# EAGLE board Placa 1 (EAGLE 7.2.0)
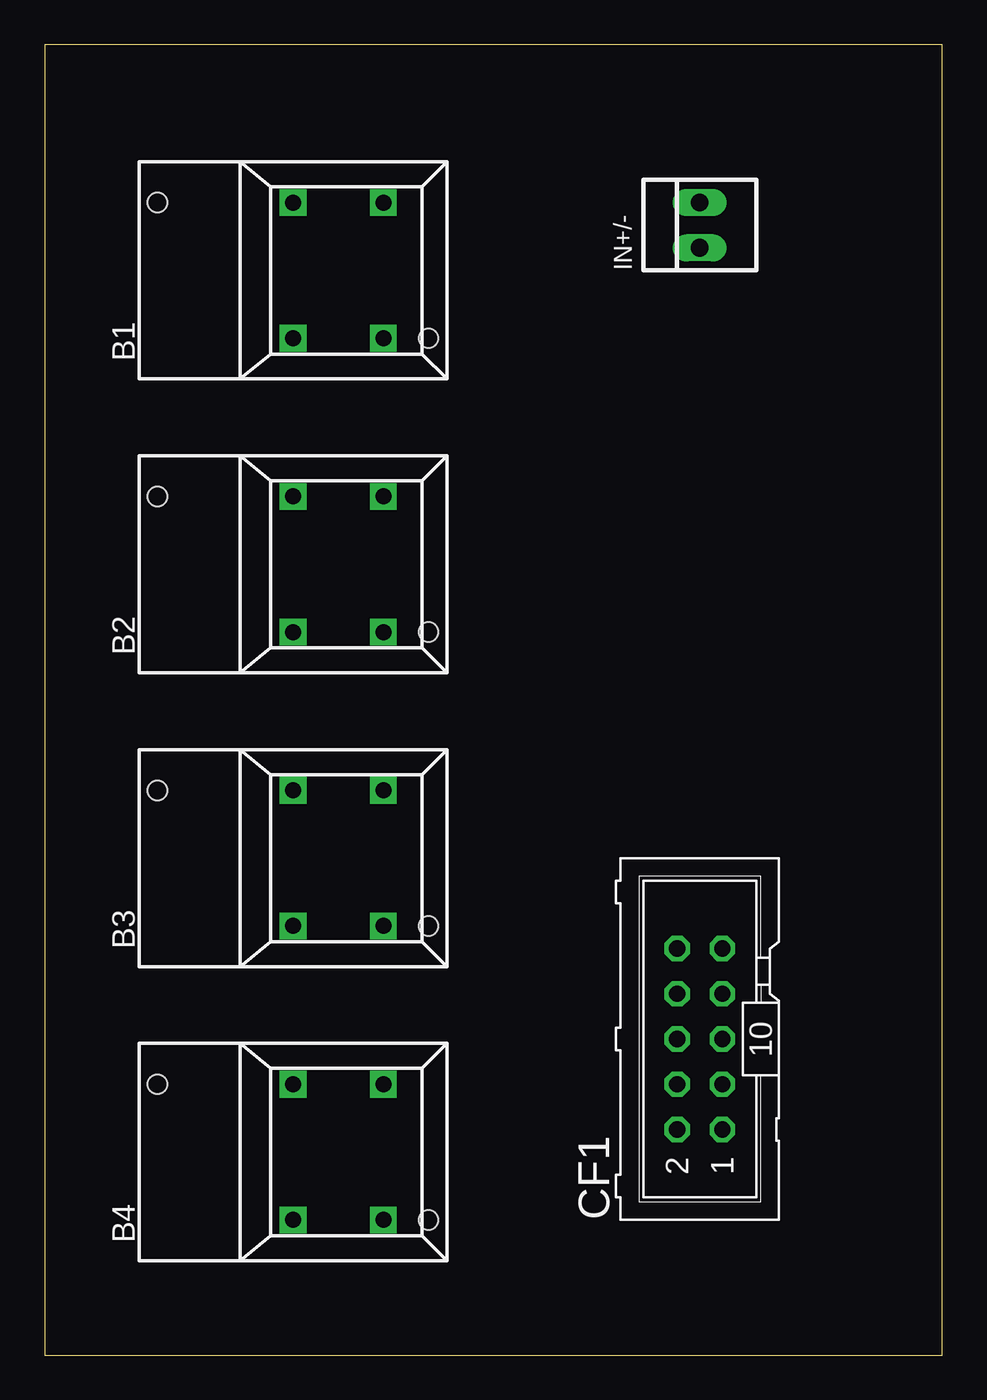
[diagram p0: board, top side]
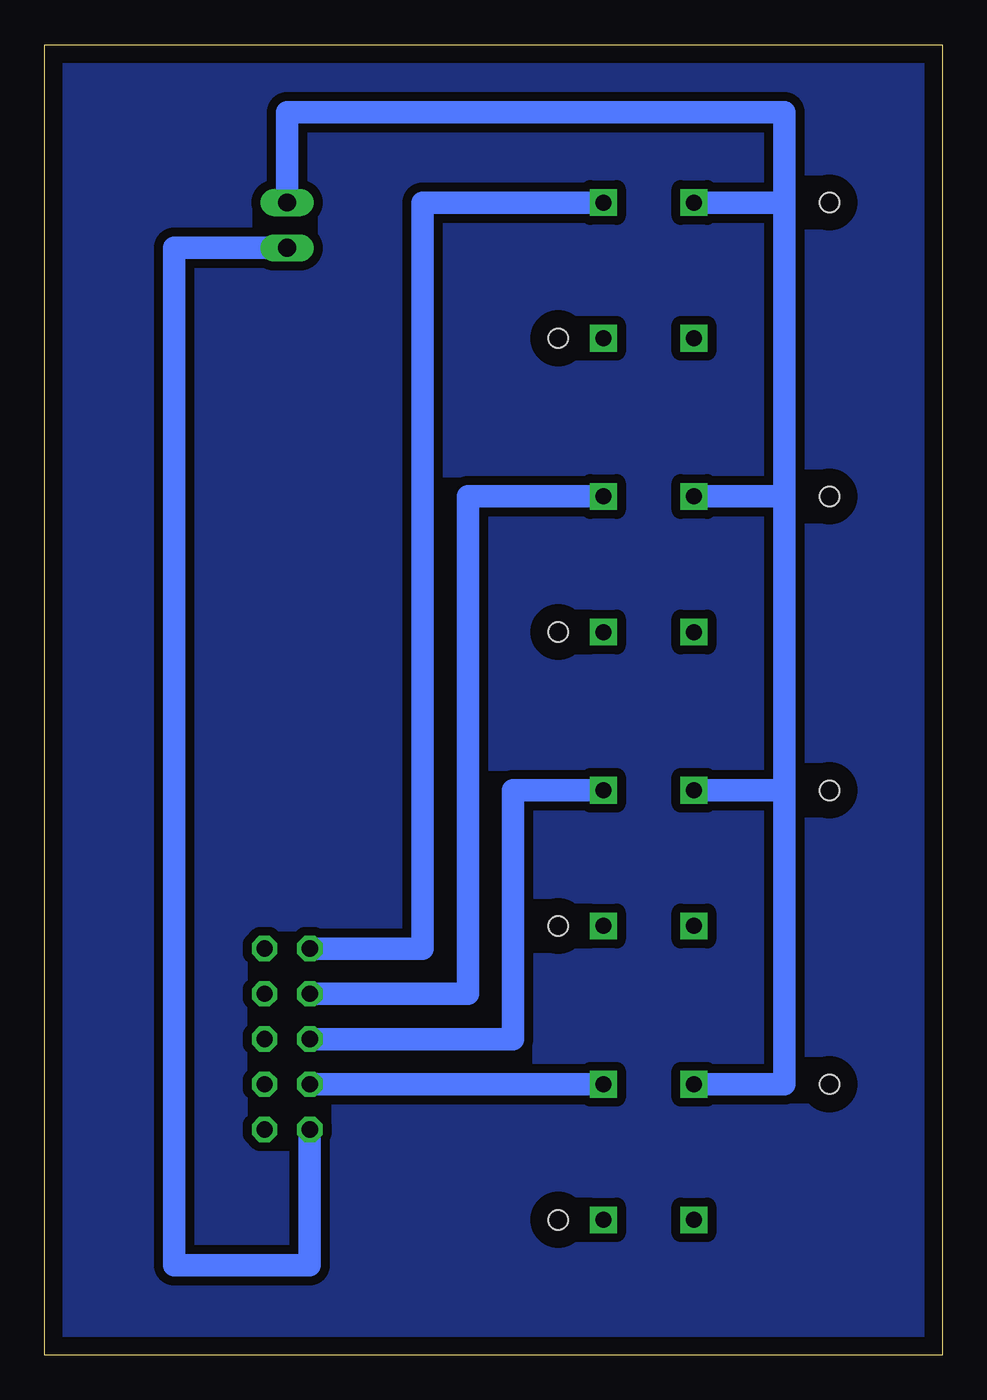
[diagram p1: board, bottom side, seen from below]

Size 50.47 x 73.65 mm. Coordinates in mm from the lower left corner, seen from the top.
Outline: 0,0 50.47,0 50.47,73.65 0,73.65 0,0
Copper layers (1*16): Top 0.035mm / dielectric 1.5mm / Bottom 0.035mm
Design rules "default *": minimum track width 10mil, minimum drill 24mil, track to track 20mil, track to pad 20mil, pad to pad 8mil, via to via 8mil, smd to smd 8mil, copper to edge 40mil, drill to drill 8mil, minimum pad ring 10mil, minimum via ring 8mil, stop-mask expansion 4mil, vias tented up to drill 0mil, thermal gap 10mil

## Footprints (pad centres in the part's own frame; a part is rotated, then mirrored left to right if it is on the bottom)
5501 = drill 0.9 pad 1.5 square: 1A 0,3.81; 1B 0,-3.81; NC 5.08,-3.81; NO 5.08,3.81 | hole 1.1: -7.62,3.81; 7.62,-3.81
ML10 = drill 0.914 octagon: 1 -5.08,-1.27; 2 -5.08,1.27; 3 -2.54,-1.27; 4 -2.54,1.27; 5 0,-1.27; 6 0,1.27; 7 2.54,-1.27; 8 2.54,1.27; 9 5.08,-1.27; 10 5.08,1.27
22-23-2021 = drill 1 long: 1 -1.27,0; 2 1.27,0

## Placement (x,y rotation side)
B1  5501  [5501]  13.97,60.96 0 top
B2  5501  [5501]  13.97,44.45 0 top
B3  5501  [5501]  13.97,27.94 0 top
B4  5501  [5501]  13.97,11.43 0 top
CF1  [ML10]  36.83,17.78 90 top
IN+/-  22-23-2021  [22-23-2021]  36.83,63.5 90 top

## Library data of the parts
B1-B4 = switch
CF1 = con-ml; OC_FARNELL: unknown; OC_NEWARK: unknown
IN+/- = con-molex; MF: MOLEX; MPN: 22-23-2021; OC_FARNELL: 1462926; OC_NEWARK: 25C3832

## Nets
GND: CF1.2 IN+/-.1
N$1: B1.1A B2.1A B3.1A B4.1A IN+/-.2
N$4: B1.NO CF1.10
N$5: B2.NO CF1.8
N$6: B3.NO CF1.6
N$7: B4.NO CF1.4

## Tracks (layer width: path | path; a pad name or v marks a point on that pad's centre or on a via)
GND
  Bottom 1.27: CF1.2 35.56,5.08 43.18,5.08 43.18,62.23 IN+/-.1
N$1
  Bottom 1.27: IN+/-.2 36.83,69.85 8.89,69.85 8.89,64.77 | 8.89,64.77 8.89,48.26 | 8.89,48.26 8.89,31.75 | 8.89,31.75 8.89,15.24 B4.1A | B3.1A 8.89,31.75 | B2.1A 8.89,48.26 | B1.1A 8.89,64.77
N$2
  pour Bottom: 0,73.66 0,0 49.53,0 49.53,73.66
N$4
  Bottom 1.27: CF1.10 29.21,22.86 29.21,64.77 B1.NO
N$5
  Bottom 1.27: B2.NO 26.67,48.26 26.67,20.32 CF1.8
N$6
  Bottom 1.27: B3.NO 24.13,31.75 24.13,17.78 CF1.6
N$7
  Bottom 1.27: B4.NO CF1.4